# EAGLE board espcam (EAGLE 9.6.2)
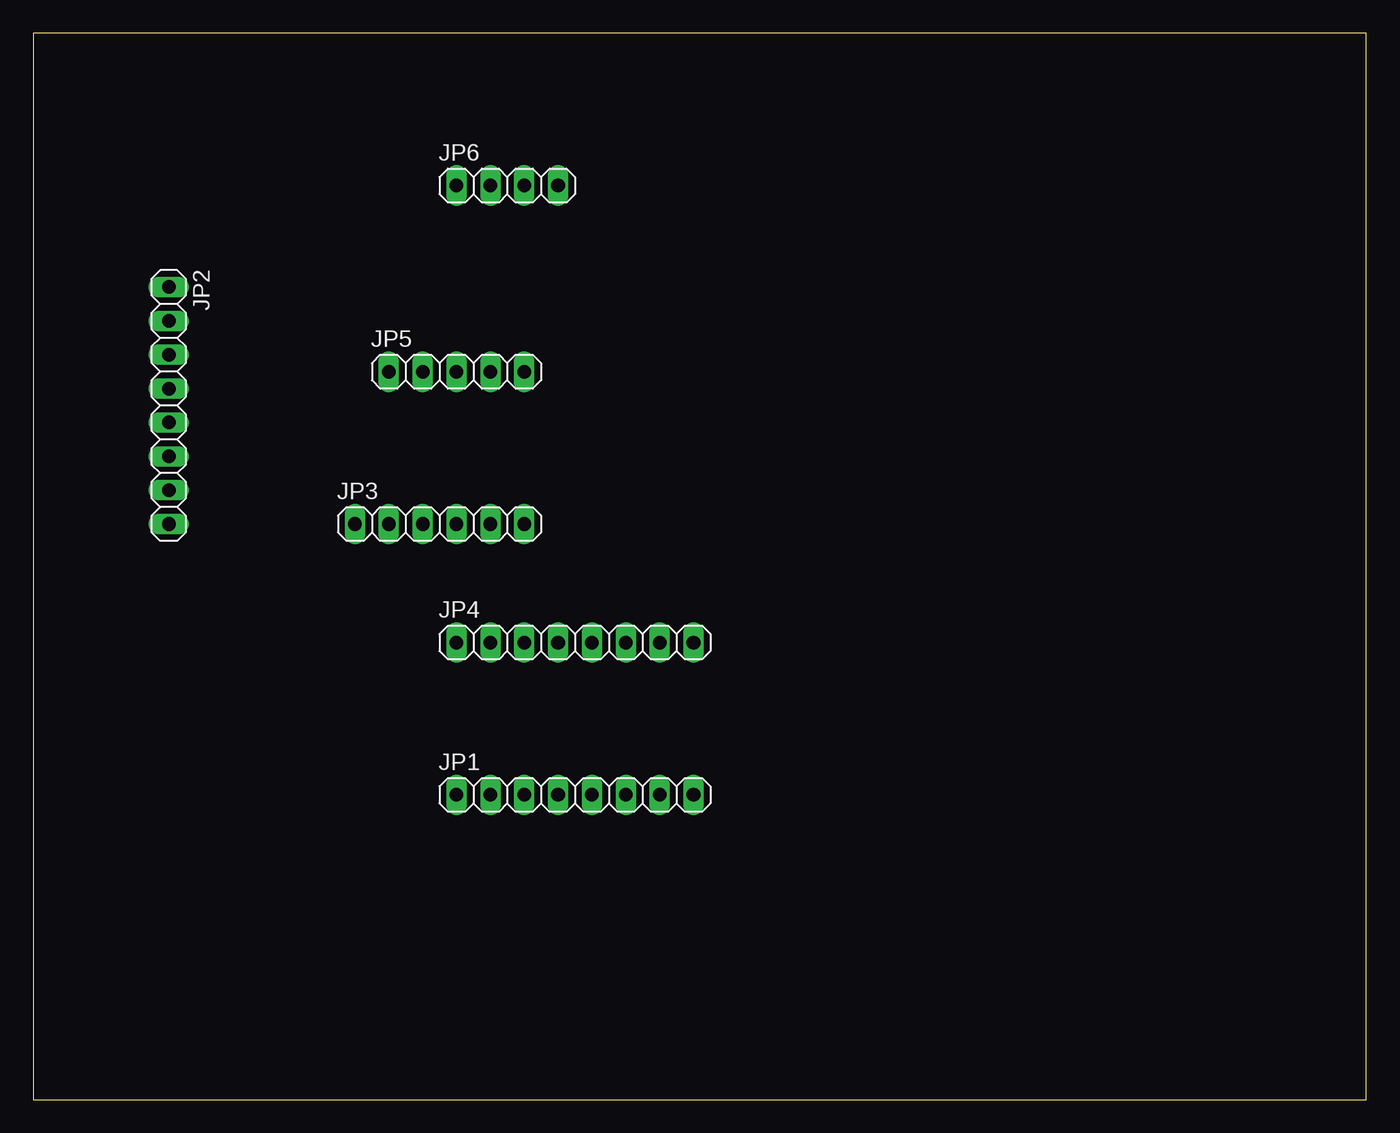
[diagram p0: board, top side]
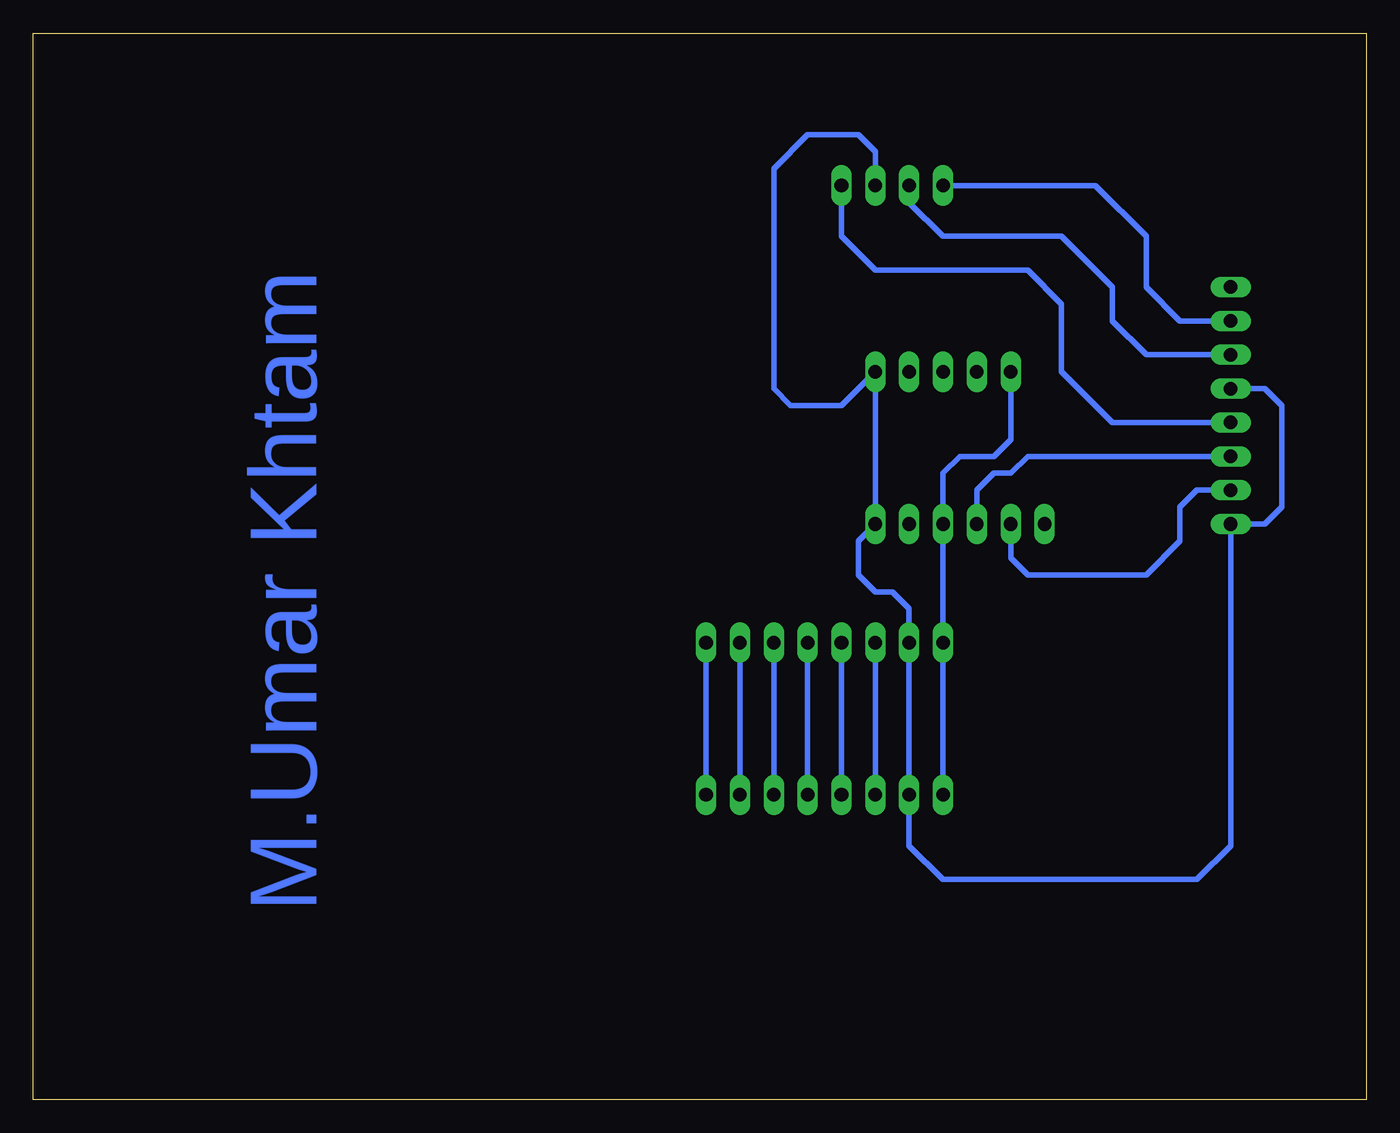
[diagram p1: board, bottom side, seen from below]

Size 100 x 80 mm. Coordinates in mm from the lower left corner, seen from the top.
Outline: 0,0 100,0 100,80 0,80 0,0
Copper layers (1*16): Top 0.035mm / dielectric 1.5mm / Bottom 0.035mm
Design rules "default": minimum track width 6mil, minimum drill 0.35mm, track to track 6mil, track to pad 6mil, pad to pad 6mil, via to via 6mil, smd to smd 6mil, copper to edge 40mil, drill to drill 6mil, minimum pad ring 10mil, minimum via ring 8mil, stop-mask expansion 4mil, vias tented up to drill 0mil, thermal gap 10mil

## Footprints (pad centres in the part's own frame; a part is rotated, then mirrored left to right if it is on the bottom)
1X08 = drill 1.016 long: 1 -8.89,0; 2 -6.35,0; 3 -3.81,0; 4 -1.27,0; 5 1.27,0; 6 3.81,0; 7 6.35,0; 8 8.89,0
1X06 = drill 1.016 long: 1 -6.35,0; 2 -3.81,0; 3 -1.27,0; 4 1.27,0; 5 3.81,0; 6 6.35,0
1X05 = drill 1.016 long: 1 -5.08,0; 2 -2.54,0; 3 0,0; 4 2.54,0; 5 5.08,0
1X04 = drill 1.016 long: 1 -3.81,0; 2 -1.27,0; 3 1.27,0; 4 3.81,0

## Placement (x,y rotation side)
JP1  [1X08]  40.64,22.86 0 top
JP2  [1X08]  10.16,52.07 270 top
JP3  [1X06]  30.48,43.18 0 top
JP4  [1X08]  40.64,34.29 0 top
JP5  [1X05]  31.75,54.61 0 top
JP6  [1X04]  35.56,68.58 0 top

## Library data of the parts
JP1-JP6 = pinhead

## Nets
3V3: JP2.1
5V: JP1.1 JP3.4 JP4.1 JP5.1
GND: JP1.2 JP2.4 JP2.8 JP3.6 JP4.2 JP5.5 JP6.3
IO0: JP2.3 JP6.2
IO2: JP1.7 JP4.7
IO4: JP1.8 JP4.8
IO12: JP1.3 JP4.3
IO13: JP1.4 JP4.4
IO14: JP1.6 JP4.6
IO15: JP1.5 JP4.5
IO16: JP2.2 JP6.1
RX: JP2.7 JP3.2
TX: JP2.6 JP3.3
VOUT: JP2.5 JP6.4

## Tracks (layer width: path | path; a pad name or v marks a point on that pad's centre or on a via)
5V
  Bottom 0.406: JP5.1 26.67,49.53 27.94,48.26 30.48,48.26 31.75,46.99 JP3.4 JP4.1 JP1.1
GND
  Bottom 0.406: JP2.4 7.62,53.34 6.35,52.07 6.35,44.45 7.62,43.18 JP2.8 10.16,19.05 12.7,16.51 31.75,16.51 34.29,19.05 JP1.2 JP4.2 34.29,36.83 35.56,38.1 36.83,38.1 38.1,39.37 38.1,41.91 JP3.6 JP5.5 39.37,52.07 43.18,52.07 44.45,53.34 44.45,69.85 41.91,72.39 38.1,72.39 36.83,71.12 JP6.3
IO0
  Bottom 0.406: JP2.3 16.51,55.88 19.05,58.42 19.05,60.96 22.86,64.77 31.75,64.77 34.29,67.31 JP6.2
IO2
  Bottom 0.406: JP1.7 JP4.7
IO4
  Bottom 0.406: JP1.8 JP4.8
IO12
  Bottom 0.406: JP1.3 JP4.3
IO13
  Bottom 0.406: JP1.4 JP4.4
IO14
  Bottom 0.406: JP1.6 JP4.6
IO15
  Bottom 0.406: JP1.5 JP4.5
IO16
  Bottom 0.406: JP2.2 13.97,58.42 16.51,60.96 16.51,64.77 20.32,68.58 JP6.1
RX
  Bottom 0.406: JP2.7 12.7,45.72 13.97,44.45 13.97,41.91 16.51,39.37 25.4,39.37 26.67,40.64 JP3.2
TX
  Bottom 0.406: JP2.6 25.4,48.26 26.67,46.99 27.94,46.99 29.21,45.72 JP3.3
VOUT
  Bottom 0.406: JP2.5 19.05,50.8 22.86,54.61 22.86,59.69 25.4,62.23 36.83,62.23 39.37,64.77 JP6.4

## Text on the board
Bottom: M.Umar Khtam